# Altium PCB QL-EOS-S3-breakout.PcbDoc
Units mm, origin at the board's own origin, x right, y up, seen from the top; angles counter-clockwise.
Board outline 17.78 x 35.56 mm, 4 copper layers (Top Layer, Layer 1, Layer 2, Bottom Layer), stack 1.17 mm thick; 45 components, 65 nets, 208 pads, 83 vias.
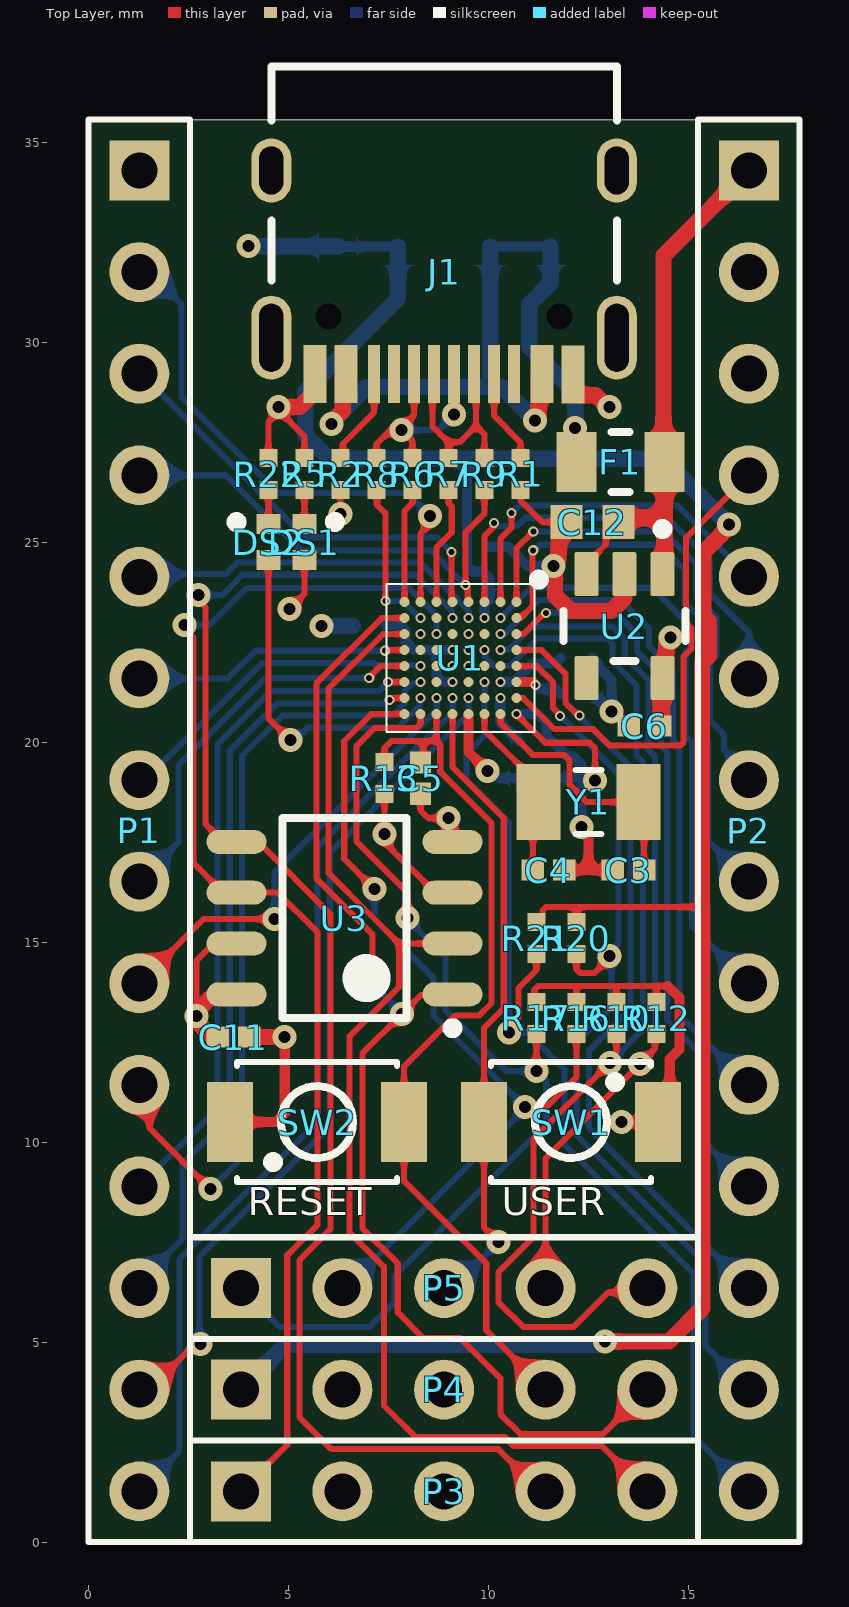
[diagram p0: Top Layer view]
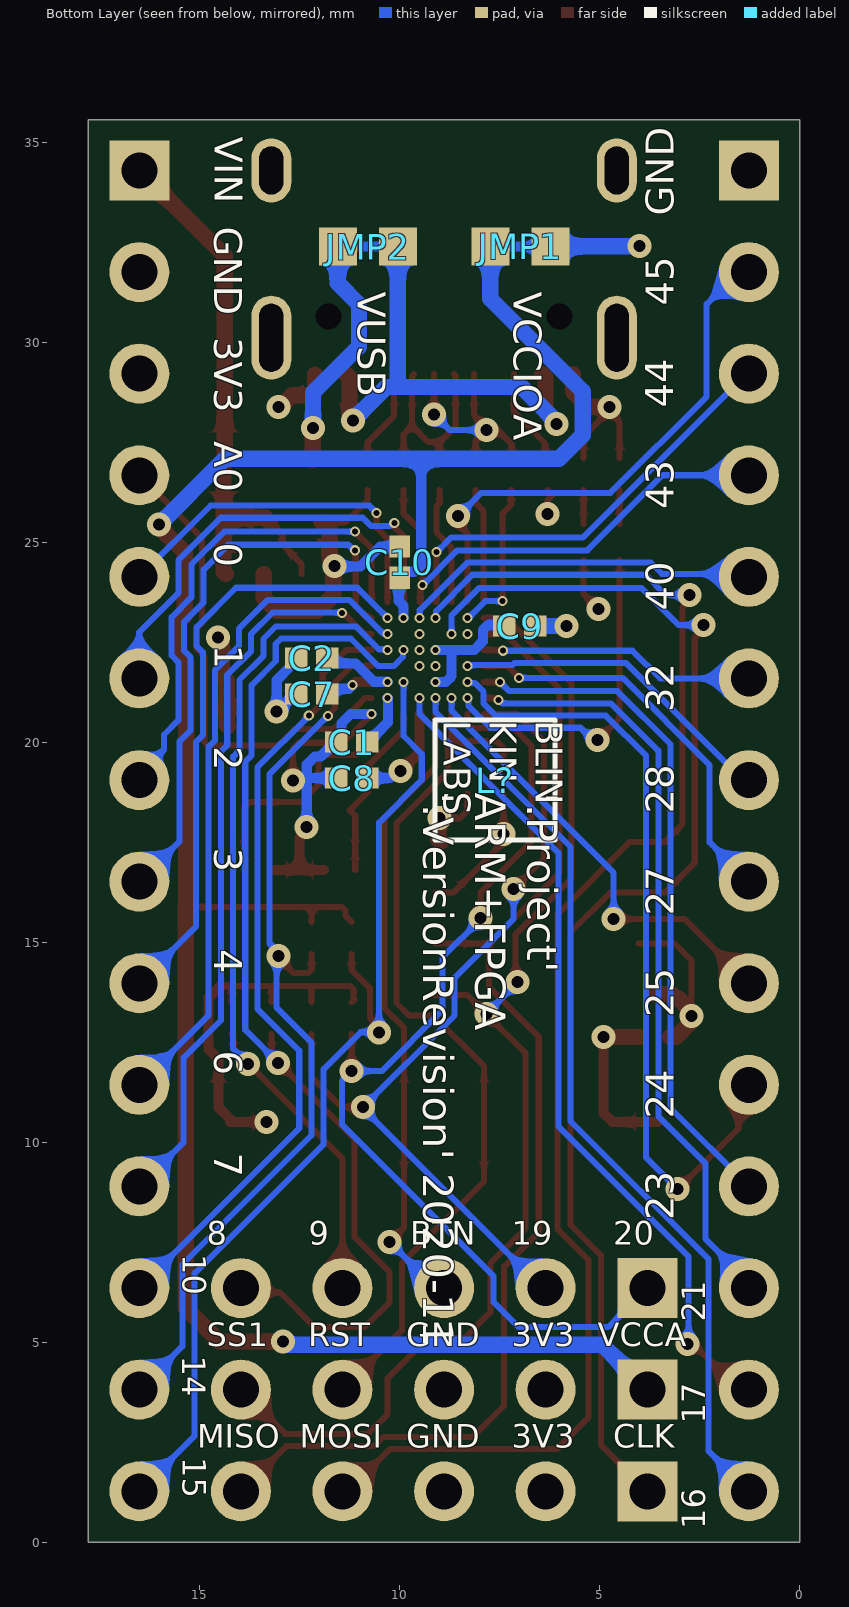
[diagram p1: Bottom Layer view, seen from below]
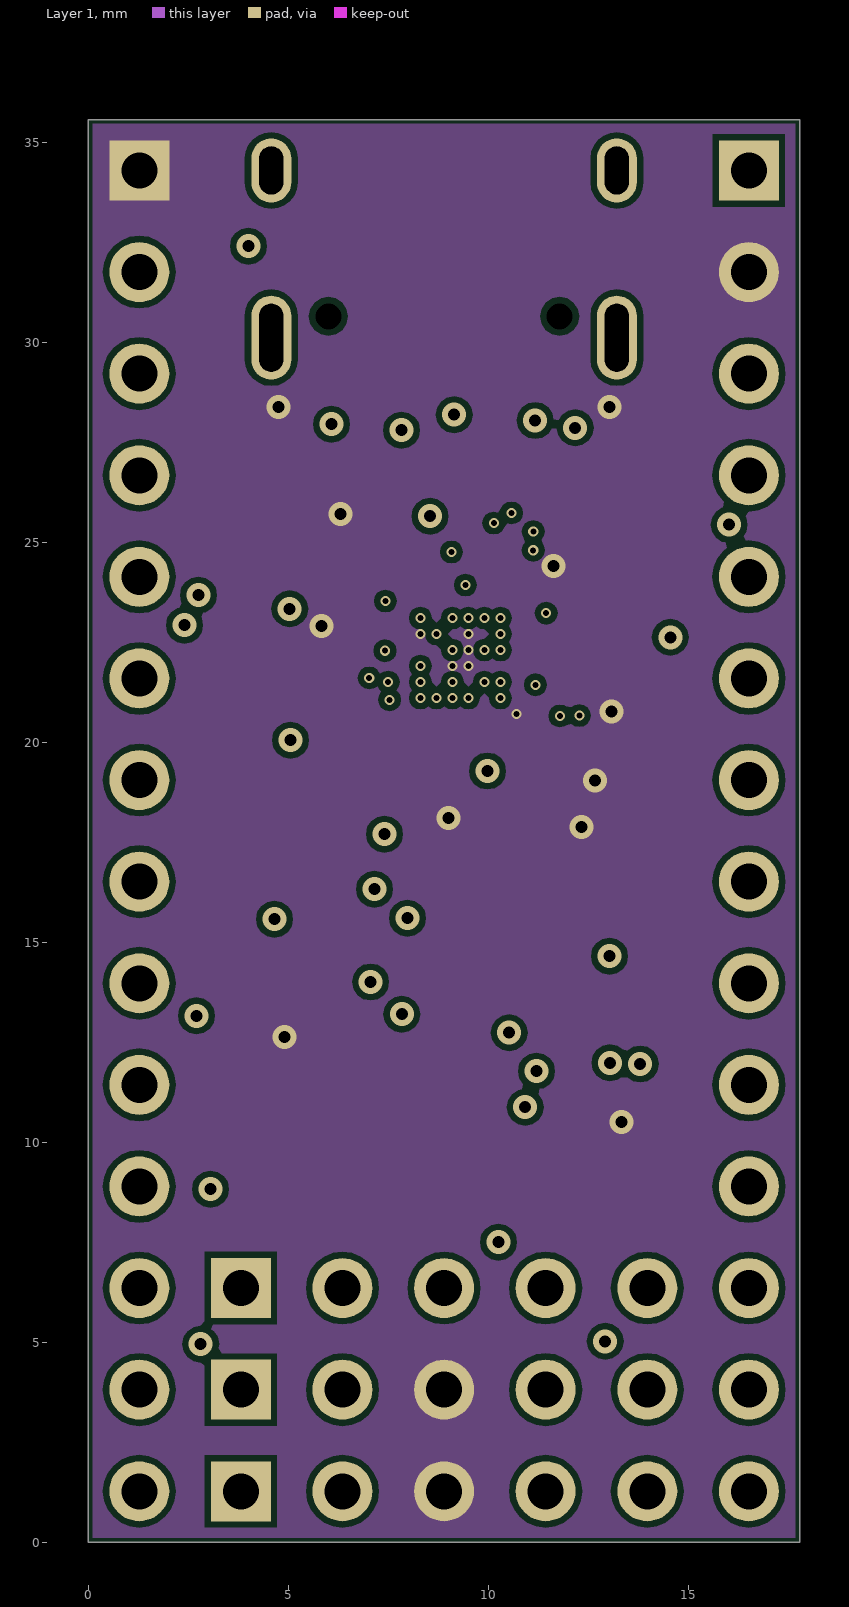
[diagram p2: Layer 1]
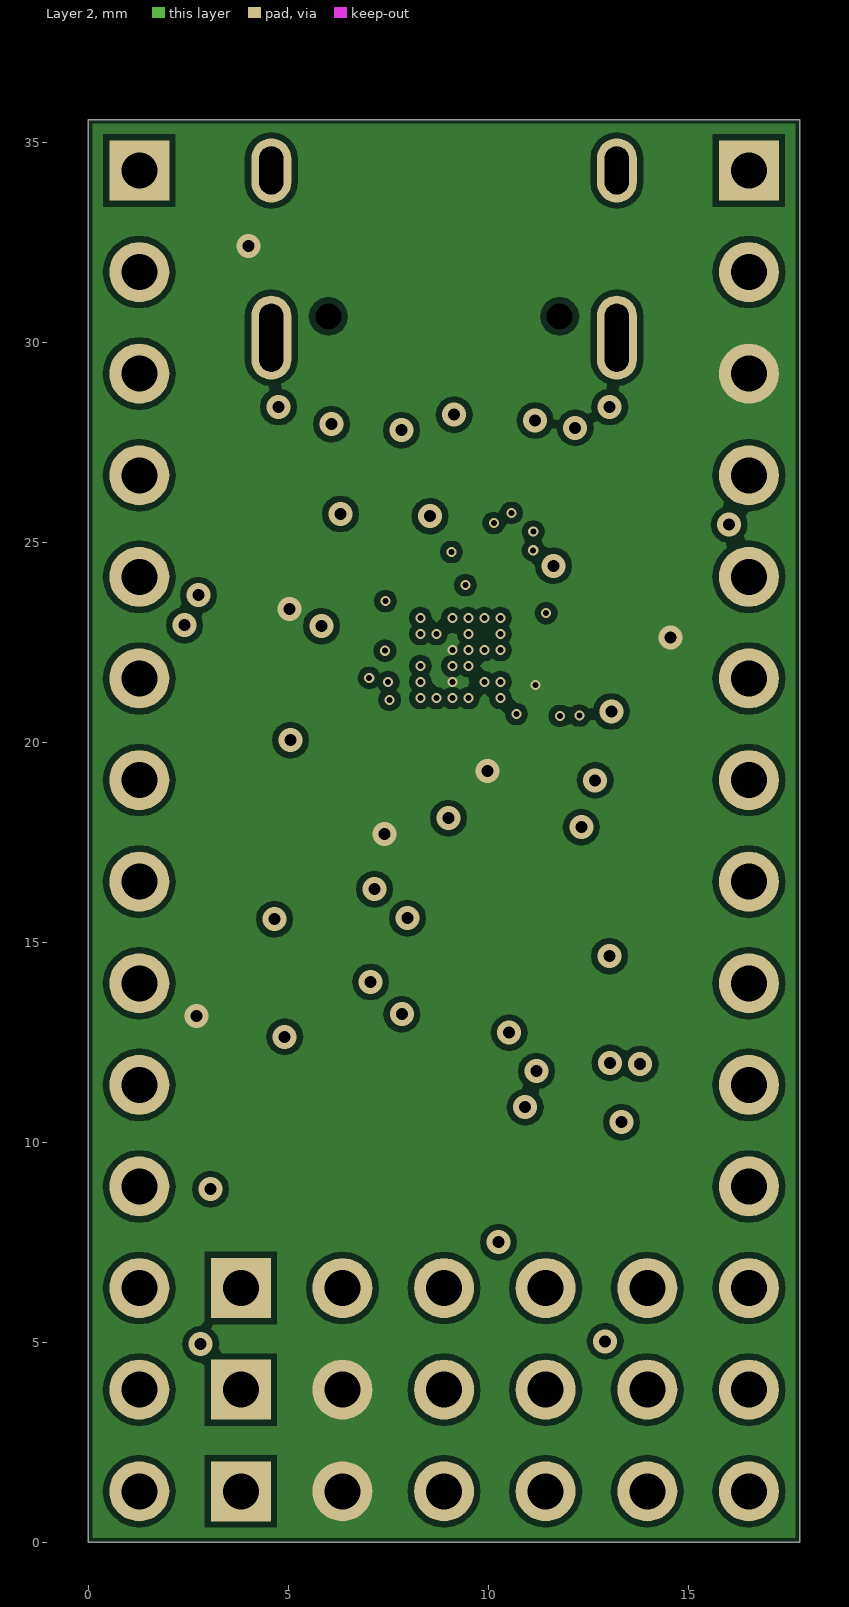
[diagram p3: Layer 2]

## Layer stack, top to bottom
Top Solder: solder mask 0.0127, SM-001, Dk 4
Top Layer: signal copper 0.035
Dielectric 2: prepreg 0.2, PP-022, Dk 4.6
Layer 1: signal copper 0.0175
Dielectric 3: core 0.665, Core-039, Dk 4.8
Layer 2: signal copper 0.0175
Dielectric 4: prepreg 0.2, PP-022, Dk 4.6
Bottom Layer: signal copper 0.035
Bottom Solder: solder mask 0.0127, SM-001, Dk 4

## Board outline
0,0 0,35.56 17.78,35.56 17.78,0

## Design rules (kind name [scope] priority, off if disabled: settings)
BoardOutlineClearance [IsPolygon] p1: gap=0.1 ignorepadtopadclearanceinfootprint=FALSE
Clearance Clearance_bga_pads [InComponent('U1') and ispad] p1: gap=0.148 ignorepadtopadclearanceinfootprint=FALSE
Clearance Clearance_jumpers [InComponent('JMP1') or InComponent('JMP2') vs InNet('VCCIOA') or InNet('+5V_USB') or InNet('+5V_FUSE')] p2: gap=0.152 ignorepadtopadclearanceinfootprint=FALSE except(0: Arc-Arc Arc-Track Arc-SMDPad Track-Track Track-SMDPad)
Clearance Clearance_bga_vias [istrack or ((ObjectKind = 'Via') And (AsMils(ViaDiameter) = 10) And (AsMils(HoleDiameter) = 5.906)  ) vs (ObjectKind = 'Via') And (AsMils(ViaDiameter) = 10) And (AsMils(HoleDiameter) = 5.906)] p3: gap=0.127 ignorepadtopadclearanceinfootprint=FALSE
Clearance [All] p4: gap=0.152 ignorepadtopadclearanceinfootprint=FALSE
HoleToHoleClearance [All] p1: gap=0.25 allowstackedmicrovias=TRUE
MinimumSolderMaskSliver MinimumSolderMaskSliver_passive [HasFootprint('CAPC1005X06L') or HasFootprint('ERJ2G(0402)_L')] p1: minsoldermaskwidth=0
MinimumSolderMaskSliver MinimumSolderMaskSliver_bga [InComponent('U1') and IsPad vs InComponent('U1') and IsPad] p2: minsoldermaskwidth=0.05
MinimumSolderMaskSliver [All] p3: minsoldermaskwidth=0.148
PolygonConnect PolygonConnect_inner_power [IsPolygon and (OnLayer('Layer 1') or OnLayer('Layer 2'))] p1: connectstyle=Direct reliefconductorwidth=0.254 reliefentries=4 polygonreliefangle="90 Angle" airgapwidth=0.254
PolygonConnect [All] p2: thpad.connectstyle=Relief thpad.reliefconductorwidth=0.254 thpad.reliefentries=4 thpad.polygonreliefangle="90 Angle" thpad.airgapwidth=0.254 smdpad.connectstyle=Relief smdpad.reliefconductorwidth=0.254 smdpad.reliefentries=4 smdpad.polygonreliefangle="90 Angle" smdpad.airgapwidth=0.254 via.connectstyle=Direct via.reliefconductorwidth=0.254 via.reliefentries=4 via.polygonreliefangle="90 Angle" via.airgapwidth=0.254
RoomDefinition "[03] SOC" [InComponentClass('[03] SOC')] p1: confinementstyle=ConfineIn formatcopy=TRUE lockcomponents=FALSE outline -3.81,-1.27 24.13,-1.27 24.13,39.37 -3.81,39.37
RoutingVias [All] p1: holewidth=0.3 width=0.6 viastyle="Through Hole" minholewidth=0.15 minwidth=0.254 maxholewidth=0.3 maxwidth=0.6
ShortCircuit ShortCircuit_jumpers [InComponent('JMP1') or InComponent('JMP2') vs InNet('VCCIOA') or InNet('+5V_USB') or InNet('+5V_FUSE')] p1: allowed=TRUE
ShortCircuit [All] p2: allowed=FALSE
SolderMaskExpansion SolderMaskExpansion_via [IsVia] p1: expansion=-99 istentingtop=FALSE
SolderMaskExpansion [All] p2: expansion=0.102 istentingtop=FALSE
Width [All] p1: maxlimit=0.406 minlimit=0.152 preferedwidth=0.254
27 further rules are at their usual default settings.

## Classes and differential pairs
net class USB: S3_USB_D_N S3_USB_D_P USB_D_N USB_D_P
net class SPI: SPI_MST_CLK SPI_MST_MISO SPI_MST_MOSI SPI_MST_SS1

## Components (designator, comment, footprint, x,y, rotation, side; value= is the part's Value field where it differs from the comment)
C1 "4.7uF" CAPC1005X06L 11.2,20 r0 bottom
C2 "4.7uF" CAPC1005X06L 12.2,22.1 r0 bottom
C3 "12pF" CAPC1005X06L 13.5,16.8 r0 top
C4 "12pF" CAPC1005X06L 11.5,16.8 r180 top
C5 "4.7uF" CAPC1005X06L 8.3,19.1 r270 top
C6 "4.7uF" CAPC1005X06L 13.9,20.4 r180 top
C7 "0.10uF" CAPC1005X06L 12.2,21.2 r180 bottom
C8 "0.10uF" CAPC1005X06L 11.2,19.1 r180 bottom
C9 "0.10uF" CAPC1005X06L 7,22.9 r0 bottom
C10 "0.10uF" CAPC1005X06L 10,24.5 r270 bottom
C11 "0.10uF" CAPC1005X06L 3.625,12.625 r180 top
C12 "4.7uF" CAPC1608X09L 12.6,25.5 r180 top
DS1 "SML-P12PTT86" FP-SML-P1-MFG 5.4,25 r270 top
DS2 "SMLP12BC7TT86" FP-SML-P12-MFG 4.5,25 r270 top
F1 "MF-PSMF050X-2" FP-MF-PSMF-MFG 13.3,27 r0 top value=0.15-0.9Ω
J1 "TYPE-C-31-M-12" TYPE-C-31-M-12 8.89,34.29 r180 top locked
JMP1 "config_jumper_0603" config_jumper_0603 6.985,32.385 r0 bottom
JMP2 "config_jumper_0603" config_jumper_0603 10.795,32.385 r0 bottom
L? "BLINKINLABS_LOGO" BLINKINLABS_LOGO_SMALL 7.62,19.05 r270 bottom
P1 "Header 14" HDR1X14 1.27,34.29 r270 top locked
P2 "Header 14" HDR1X14 16.51,34.29 r270 top locked
P3 "Header 5" HDR1X5 3.81,1.27 r0 top
P4 "Header 5" HDR1X5 3.81,3.81 r0 top
P5 "Header 5" HDR1X5 3.81,6.35 r0 top
R1 "5.1k" ERJ2G(0402)_L 10.8,26.7 r270 top
R2 "5.1k" ERJ2G(0402)_L 6.3,26.7 r90 top
R5 "1.5k" ERJ2G(0402)_L 5.4,26.7 r270 top
R6 "22" ERJ2G(0402)_L 8.1,26.7 r90 top
R7 "22" ERJ2G(0402)_L 9,26.7 r90 top
R8 "1.5k" ERJ2G(0402)_L 7.2,26.7 r90 top
R9 "1.5k" ERJ2G(0402)_L 9.9,26.7 r90 top
R10 "10k" ERJ2G(0402)_L 13.2,13.1 r90 top
R12 "10k" ERJ2G(0402)_L 14.2,13.1 r90 top
R13 "10k" ERJ2G(0402)_L 7.4,19.1 r90 top
R16 "10k" ERJ2G(0402)_L 12.2,13.1 r90 top
R17 "10k" ERJ2G(0402)_L 11.2,13.1 r90 top
R20 "10k" ERJ2G(0402)_L 12.2,15.1 r270 top
R21 "10k" ERJ2G(0402)_L 11.2,15.1 r270 top
R22 "1.5k" ERJ2G(0402)_L 4.5,26.7 r90 top
SW1 "TS-1185" TS-1185 12.065,10.5 r180 top
SW2 "TS-1185" TS-1185 5.715,10.5 r0 top
U1 "QL-EOS-S3" BGA64C40P8X8_350X350X80 9.3,22.1 r270 top
U2 "TLV73333PDBVR" FP-DBV0005A-MFG 13.4,22.9 r270 top
U3 "GD25Q16CTIG" SOP127P600X175-8N-2 6.4,15.6 r180 top
Y1 "ECS-.327-12.5-34B-TR" FP-ECX-31B-MFG 12.5,18.5 r180 top

## Footprints (in the part's own frame and the unit in brackets; to place one, negate y for a bottom-side part, rotate by r counter-clockwise, add the part's x,y. Pads: shape width x height; smd on the part's side, far side on the other; paste and mask are expansions set on the pad)
BGA64C40P8X8_350X350X80 [mm] "BGA, 64-Leads, Body 3.50x3.50mmx0.80mm, Pitch 0.40mm"
  round 0.25 smd mask+0.05: A1(-1.4,1.4) A2(-1,1.4) A3(-0.6,1.4) A4(-0.2,1.4) A5(0.2,1.4) A6(0.6,1.4) A7(1,1.4) A8(1.4,1.4) B1(-1.4,1) B2(-1,1) B3(-0.6,1) B4(-0.2,1) B5(0.2,1) B6(0.6,1) B7(1,1) B8(1.4,1) C1(-1.4,0.6) C2(-1,0.6) C3(-0.6,0.6) C4(-0.2,0.6) C5(0.2,0.6) C6(0.6,0.6) C7(1,0.6) C8(1.4,0.6) D1(-1.4,0.2) D2(-1,0.2) D3(-0.6,0.2) D4(-0.2,0.2) D5(0.2,0.2) D6(0.6,0.2) D7(1,0.2) D8(1.4,0.2) E1(-1.4,-0.2) E2(-1,-0.2) E3(-0.6,-0.2) E4(-0.2,-0.2) E5(0.2,-0.2) E6(0.6,-0.2) E7(1,-0.2) E8(1.4,-0.2) F1(-1.4,-0.6) F2(-1,-0.6) F3(-0.6,-0.6) F4(-0.2,-0.6) F5(0.2,-0.6) F6(0.6,-0.6) F7(1,-0.6) F8(1.4,-0.6) G1(-1.4,-1) G2(-1,-1) G3(-0.6,-1) G4(-0.2,-1) G5(0.2,-1) G6(0.6,-1) G7(1,-1) G8(1.4,-1) H1(-1.4,-1.4) H2(-1,-1.4) H3(-0.6,-1.4) H4(-0.2,-1.4) H5(0.2,-1.4) H6(0.6,-1.4) H7(1,-1.4) H8(1.4,-1.4)
  silkscreen extent -2.08,-1.85 1.85,2.08, body extent -1.75,-1.75 1.75,1.75, height 0.8
BLINKINLABS_LOGO_SMALL [mm] "Small blinkinlabs logo"
  silkscreen extent -1.5,-1.5 1.5,1.5
CAPC1005X06L [mm] "Chip Capacitor, 2-Leads, Body 1.00x0.50mm, IPC High Density"
  rect 0.56x0.52 smd: 1(-0.39,0) 2(0.39,0)
  body extent -0.53,-0.28 0.53,0.28, height 0.55
CAPC1608X09L [mm] "Chip Capacitor, 2-Leads, Body 1.60x0.80mm, IPC High Density"
  rect 0.8x0.85 smd: 1(-0.65,0) 2(0.65,0)
  body extent -0.85,-0.45 0.85,0.45, height 0.9
config_jumper_0603 [mm]
  rect 0.95x0.95 smd: 1(-0.75,0) 2(0.75,0)
  Top Layer lines w0.254: -0.75,0 0.75,0
ERJ2G(0402)_L [mm] "Chip Resistor, 2-Leads, Body 1.00x0.50mm, IPC High Density"
  rect 0.45x0.45 smd: 1(-0.4,0) 2(0.4,0)
  body extent -0.53,-0.27 0.53,0.28, height 0.4
FP-DBV0005A-MFG [mm]
  rrect17% 1.1x0.6 smd paste+0 mask+0: 1(-1.3,0.95) 2(-1.3,0) 3(-1.3,-0.95) 4(1.3,-0.95) 5(1.3,0.95)
  silkscreen extent -2.55,-1.53 0.87,1.52, body extent -1.95,-1.78 1.95,1.78, height 0.25
FP-ECX-31B-MFG [mm]
  rect 1.1x1.9 smd paste+0 mask+0: 1(-1.25,0) 2(1.25,0)
  silkscreen extent -0.33,-0.8 0.33,0.8, body extent -1.9,-1.05 1.9,1.05, height 0.25
FP-MF-PSMF-MFG [mm]
  rect 1x1.5 smd paste+0 mask+0: 1(-1.1,0) 2(1.1,0)
  silkscreen extent -0.23,-0.75 0.23,0.75, body extent -1.7,-0.85 1.7,0.85, height 0.25
FP-SML-P1-MFG [mm]
  rect 0.5x0.6 smd paste+0 mask+0: 1(-0.45,0) 2(0.45,0)
  silkscreen extent -0.63,0.64 -0.38,0.89, body extent -0.8,-0.43 0.8,0.43, height 0.25
FP-SML-P12-MFG [mm]
  rect 0.5x0.6 smd paste+0 mask+0: 1(-0.45,0) 2(0.45,0)
  silkscreen extent -0.62,-0.92 -0.38,-0.67, body extent -0.8,-0.43 0.8,0.43, height 0.25
HDR1X5 [mm] "Connector; Header; 5 Position"
  rect 1.5x1.5 hole 0.9: 1(0,0)
  round 1.5 hole 0.9: 2(2.54,0) 3(5.08,0) 4(7.62,0) 5(10.16,0)
  silkscreen extent -1.27,-1.27 11.43,1.27
HDR1X14 [mm] "Connector; Header; 14 Position"
  rect 1.5x1.5 hole 0.9: 1(0,0)
  round 1.5 hole 0.9: 2(2.54,0) 3(5.08,0) 4(7.62,0) 5(10.16,0) 6(12.7,0) 7(15.24,0) 8(17.78,0) 9(20.32,0) 10(22.86,0) 11(25.4,0) 12(27.94,0) 13(30.48,0) 14(33.02,0)
  silkscreen extent -1.27,-1.27 34.29,1.27
SOP127P600X175-8N-2 [mm] "SOP, 8-Leads, Body 4.90x3.85mm, Pitch 1.27mm, IPC Medium Density"
  oval 1.5x0.6 smd: 1(-2.7,1.905) 2(-2.7,0.635) 3(-2.7,-0.635) 4(-2.7,-1.905) 5(2.7,-1.905) 6(2.7,-0.635) 7(2.7,0.635) 8(2.7,1.905)
  silkscreen extent -2.83,-2.5 1.55,2.88, body extent -3,-2.5 3,2.5, height 1.75
TS-1185 [mm] "3x4x2mm Tact Switch, no alignment pin"
  rect 1.15x2 smd: 1(-2.175,0) 2(2.175,0)
  silkscreen extent -2,-1.5 2,1.5, body extent -2,-1.5 2,1.5, height 2
TYPE-C-31-M-12 [mm] "USB Connector TYPE-C-31-M-12 Female 16P SMD"
  rect 0.575x1.45 smd mask+0.03: A1/B12(-3.225,5.1) A4/B9(-2.45,5.092) A9/B4(2.45,5.092) A12/B1(3.225,5.092)
  rect 0.3x1.45 smd mask+0.03: A5(-1.25,5.092) A6(-0.25,5.092) A7(0.25,5.092) A8(1.25,5.092) B5(1.75,5.092) B6(0.75,5.092) B7(-0.75,5.092) B8(-1.75,5.092)
  round 0 hole 0.65 unplated paste+0: MP1(-2.89,3.65) MP2(2.89,3.65)
  rrect100% 1x2.1 hole 0.6 slot 1.7 at 90 deg: SHIELD1(-4.32,4.18) SHIELD2(4.32,4.18)
  rrect100% 1x1.6 hole 0.6 slot 1.2 at 90 deg: SHIELD3(-4.32,0) SHIELD4(4.32,0)
  silkscreen extent -4.32,-2.6 4.32,2.75, body extent -4.79,-2.6 4.79,5.11, height 3.31

## Part data
C1 C2 C5 C6: library part GRM155R60J475ME47D, "CAP CER 4.7UF 6.3V X5R 0402", Case/Package=0402, Digi-Key Part Number=490-5915-1-ND, Manufacturer="Murata Electronics North America", Operating Temperature="-55°C ~ 85°C", Package / Case="0402 (1005 Metric)", Temperature Coefficient=X5R, Tolerance=±20%, Voltage=6.3V, Applications="General Purpose", Datasheets=http://www.murata.com/~/media/webrenewal/support/library/catalog/products/capacitor/mlcc/c02e.pdf, Features="Derating Recommended", Image=//media.digikey.com/Renders/Murata%20Renders/ZRB-SERIES-0402.jpg, Packaging="Cut Tape (CT)", PartNumber=GRM155R60J475ME47D, Series=GRM
C3 C4: library part GRM1555C1E120GA01D, "CAP CER 12PF 25V NP0 0402", Case/Package=0402, Digi-Key Part Number=490-8169-1-ND, Manufacturer="Murata Electronics North America", Operating Temperature="-55°C ~ 125°C", Package / Case="0402 (1005 Metric)", Temperature Coefficient="C0G, NP0", Tolerance=±2%, Voltage=25V, Applications="General Purpose", Datasheets=http://www.murata.com/~/media/webrenewal/support/library/catalog/products/capacitor/mlcc/c02e.pdf, Features=-, Image=//media.digikey.com/Renders/Murata%20Renders/ZRB-SERIES-0402.jpg, Packaging="Cut Tape (CT)", PartNumber=GRM1555C1E120GA01D, Series=GRM
C7 C8 C9 C10 C11: library part GRM152R61A104ME19D, "CAP CER 0.1UF 10V X5R 0402", Case/Package=0402, Digi-Key Part Number=490-10009-1-ND, Manufacturer="Murata Electronics North America", Operating Temperature="-55°C ~ 85°C", Package / Case="0402 (1005 Metric)", Temperature Coefficient=X5R, Tolerance=±20%, Voltage=10V, Applications="General Purpose", Datasheets=http://www.murata.com/~/media/webrenewal/support/library/catalog/products/capacitor/mlcc/c02e.pdf, Features="Derating Recommended", Image=//media.digikey.com/Renders/Murata%20Renders/ZRB-SERIES-0402.jpg, Packaging="Cut Tape (CT)", PartNumber=GRM152R61A104ME19D, Series=GRM
C12: library part GRM188R61A475KE15D, "CAP CER 4.7UF 10V X5R 0603", Case/Package=0603, Digi-Key Part Number=490-10477-1-ND, Manufacturer="Murata Electronics North America", Operating Temperature="-55°C ~ 85°C", Package / Case="0603 (1608 Metric)", Temperature Coefficient=X5R, Tolerance=±10%, Voltage=10V, Applications="General Purpose", Datasheets=http://www.murata.com/~/media/webrenewal/support/library/catalog/products/capacitor/mlcc/c02e.pdf, Features="Derating Recommended", Image=//media.digikey.com/Renders/Murata%20Renders/ZRB-SERIES-0402.jpg, PartNumber=GRM188R61A475KE15D, Series=GRM
DS1: library part CMP-08952-000020-1, "LED GREEN CLEAR 1006 SMD", Colour=Green, Forward Current=20mA, Forward Voltage=2.1V, Manufacturer=Rohm, Package=SML-P1, Power Dissipation=52mW, Reverse Voltage=5V, Temperature="-40°C to +85°C", Temperature Range High=+85°C, Temperature Range Low=-40°C, Automotive=No, Category=Diode, ComponentLink2Description=Datasheet, ComponentLink2URL=https://www.rohm.com/datasheet/SML-P12DT(R), Device Class L1=Optoelectronics, Device Class L2=LEDs, Device Class L3=unset, Digikey Description="LED GREEN CLEAR 1006 SMD", Height=0.25mm, Lead Free=Yes, Led Orientation="Top View", Luminous Intensity=10mcd, Manufacturer Part Number=SML-P12PTT86, Mouser Description="Standard LEDs - SMD SMD Green 13 mcd height=0.2", Octopart=https://octopart.com/sml-p12ptt86-rohm-9290705, RoHS=TRUE, Wavelength=560nm
DS2: library part CMP-08952-000025-1, "LED BLUE CLEAR 1006 SMD", Colour=Blue, Forward Current=5mA, Forward Voltage=2.9V, Manufacturer=Rohm, Package=SML-P12, Power Dissipation=66mW, Reverse Voltage=5V, Temperature="-40°C to +85°C", Temperature Range High=+85°C, Temperature Range Low=-40°C, Automotive=No, Category=Diode, ComponentLink2Description=Datasheet, ComponentLink2URL=https://media.digikey.com/pdf/Data%20Sheets/Rohm%20PDFs/SML-P1_Series_RevB.pdf, Device Class L1=Optoelectronics, Device Class L2=LEDs, Device Class L3=unset, Digikey Description="LED BLUE CLEAR 1006 SMD", Height=0.25mm, Lead Free=Yes, Led Orientation="Top View", Luminous Intensity=17mcd, Manufacturer Part Number=SMLP12BC7TT86, Mouser Description="ROHM SMLP12BC7TT86, SML-P12 PICOLED Series Blue LED, 1006(0402), Rectangle Lens", Octopart=https://octopart.com/smlp12bc7tt86-rohm-9290887, RoHS=TRUE, Wavelength=470nm
F1: library part CMP-07400-000013-1, "PTC RESET FUSE 6V 500MA 0805", Ambient Temperature Range High=+85°C, Ambient Temperature Range Low=-40°C, Current Rating=40A, Hold Current=0.5A, Manufacturer="Bourns Inc.", Package=MF-PSMF, Resistance=0.15-0.9Ω, Temperature="-40°C to +85°C", Trip Current=1A, Voltage Rating=6V, Automotive=Yes, Category=Fuse, ComponentLink2Description=Datasheet, ComponentLink2URL=https://www.bourns.com/docs/product-datasheets/mfpsmf.pdf?sfvrsn=9c05cafe_24, Device Class L1="Circuit Protection", Device Class L2="PTC Resettable Fuses", Device Class L3=unset, Digikey Description="PTC RESET FUSE 6V 500MA 0805", Height=0.85mm, Lead Free=Yes, Manufacturer Part Number=MF-PSMF050X-2, Mouser Description="Resettable Fuses - PPTC .50A 6V 0.15ohm Hold .5 Trip 1", Octopart=https://octopart.com/mf-psmf050x-2-bourns-7483438, RoHS=TRUE, Temperature Range High=+85°C, Temperature Range Low=-40°C, Trip Time=0.1s
J1: "USB Connector TYPE-C-31-M-12 Female 16P SMD", Manufacturer=HRO, PartNumber=TYPE-C-31-M-12
JMP1 JMP2: "Shorted-by-default jumper, with 0603 pad"
L?: "Square logo"
P1 P2: "Header, 14-Pin", LatestRevisionDate=17-Jul-2002, LatestRevisionNote="Re-released for DXP Platform.", Publisher="Altium Limited"
P3 P4 P5: "Header, 5-Pin", LatestRevisionDate=17-Jul-2002, LatestRevisionNote="Re-released for DXP Platform.", Publisher="Altium Limited"
R1 R2: library part ERJ-2GEJ512X, "RES SMD 5.1K OHM 5% 1/10W 0402", Case/Package=0402, Digi-Key Part Number=P5.1KJCT-ND, Manufacturer="Panasonic Electronic Components", Operating Temperature="-55°C ~ 155°C", Package / Case="0402 (1005 Metric)", Power (Watts)="0.1W, 1/10W", Temperature Coefficient=±200ppm/°C, Tolerance=±5%, Composition="Thick Film", Datasheets=http://industrial.panasonic.com/www-cgi/jvcr13pz.cgi?E+PZ+3+AOA0001+ERJ2GEJ512X+7+WW, Features="Automotive AEC-Q200", Height - Seated (Max)="0.016\" (0.40mm)", Image=//media.digikey.com/Photos/Panasonic%20Photos/ERJ-PA2-Series.jpg, Number of Terminations=2, PartNumber=ERJ-2GEJ512X, Series=ERJ, Size / Dimension="0.039\" L x 0.020\" W (1.00mm x 0.50mm)"
R5 R8 R9 R22: library part ERJ-2GEJ152X, "RES SMD 1.5K OHM 5% 1/10W 0402", Case/Package=0402, Digi-Key Part Number=P1.5KJCT-ND, Manufacturer="Panasonic Electronic Components", Operating Temperature="-55°C ~ 155°C", Package / Case="0402 (1005 Metric)", Power (Watts)="0.1W, 1/10W", Temperature Coefficient=±200ppm/°C, Tolerance=±5%, Composition="Thick Film", Datasheets=http://industrial.panasonic.com/www-cgi/jvcr13pz.cgi?E+PZ+3+AOA0001+ERJ2GEJ152X+7+WW, Features="Automotive AEC-Q200", Height - Seated (Max)="0.016\" (0.40mm)", Image=//media.digikey.com/Photos/Panasonic%20Photos/ERJ-PA2-Series.jpg, Number of Terminations=2, PartNumber=ERJ-2GEJ152X, Series=ERJ, Size / Dimension="0.039\" L x 0.020\" W (1.00mm x 0.50mm)"
R6 R7: library part ERJ-2GEJ220X, "RES SMD 22 OHM 5% 1/10W 0402", Case/Package=0402, Digi-Key Part Number=P22JCT-ND, Manufacturer="Panasonic Electronic Components", Operating Temperature="-55°C ~ 155°C", Package / Case="0402 (1005 Metric)", Power (Watts)="0.1W, 1/10W", Temperature Coefficient=±200ppm/°C, Tolerance=±5%, Composition="Thick Film", Datasheets=http://industrial.panasonic.com/www-cgi/jvcr13pz.cgi?E+PZ+3+AOA0001+ERJ2GEJ220X+7+WW, Features="Automotive AEC-Q200", Height - Seated (Max)="0.016\" (0.40mm)", Image=//media.digikey.com/Photos/Panasonic%20Photos/ERJ-PA2-Series.jpg, Number of Terminations=2, PartNumber=ERJ-2GEJ220X, Series=ERJ, Size / Dimension="0.039\" L x 0.020\" W (1.00mm x 0.50mm)"
R10 R12 R13 R16 R17 R20 R21: library part ERJ-2GEJ103X, "RES SMD 10K OHM 5% 1/10W 0402", Case/Package=0402, Digi-Key Part Number=P10KJCT-ND, Manufacturer="Panasonic Electronic Components", Operating Temperature="-55°C ~ 155°C", Package / Case="0402 (1005 Metric)", Power (Watts)="0.1W, 1/10W", Temperature Coefficient=±200ppm/°C, Tolerance=±5%, @ qty=1500, Composition="Thick Film", Datasheets=http://industrial.panasonic.com/www-cgi/jvcr13pz.cgi?E+PZ+3+AOA0001+ERJ2GEJ103X+7+WW, Factory Stock=0, Failure Rate=-, Features="Automotive AEC-Q200", Height - Seated (Max)="0.016\" (0.40mm)", Image=//media.digikey.com/Photos/Panasonic%20Photos/ERJ-PA2-Series.jpg, Minimum Quantity=1, Number of Terminations=2, Packaging="Cut Tape (CT)", Part Number=ERJ-2GEJ103X, Part Status=Active, PartNumber=ERJ-2GEJ103X, Quantity Available=2560215, Series=ERJ, Size / Dimension="0.039\" L x 0.020\" W (1.00mm x 0.50mm)", Unit Price (USD)=0.00350
SW1 SW2: "Tact Switch, 3x4mm, no alignment pin, turtle style", Manufacturer=XKB, PartNumber=TS-1185
U1: "QuickLogicEOS S3 Ultra Low Power multicore MCU", Manufacturer="QuickLogic Corporation", PartNumber=QL-EOS-S3
U2: library part CMP-04917-000053-1, "IC REG LINEAR 3.3V 300MA SOT23-5", Dropout Voltage=125mV, Manufacturer="Texas Instruments", Max Junction Temp=+125°C, Max Supply Voltage=5.5V, Min Supply Voltage=1.4V, Nominal Supply Current=34uA, Output Current=300mA, Output Voltage=3.3V, Package=DBV0005A, Temperature="-40°C to +125°C", Temperature Range Low=-40°C, Accuracy Percentage=1%, Automotive=No, Category=IC, ComponentLink2Description=Datasheet, ComponentLink2URL=http://www.ti.com/lit/ds/symlink/tlv733p.pdf, Device Class L1="Integrated Circuits (ICs)", Device Class L2="Power Management ICs", Device Class L3="Voltage Regulators - Linear", Digikey Description="IC REG LINEAR 3.3V 300MA SOT23-5", Height=1.45mm, Lead Free=Yes, Manufacturer Part Number=TLV73333PDBVR, Mouser Description="LDO Voltage Regulators Capacitr-Free 300-mA 5-SOT-23 -40 to 125", Number Of Outputs=1, Octopart=https://octopart.com/tlv73333pdbvr-texas+instruments-51080890, Output Type=Fixed, RoHS=TRUE, Standoff Height=0mm, Temperature Range High=+125°C
U3: "16M-bit Serial Flash, 256 Bytes per programmable page, standard, dual, quad SPI", Manufacturer=Gigadevice, PartNumber=GD25Q16CTIG
Y1: library part CMP-40224-000020-1, "CRYSTAL 32.7680KHZ 12.5PF SMD", Case/Package=SMD/SMT, ESR (Equivalent Series Resistance)=70kR, Frequency=32.768kHz, Frequency Tolerance=20ppm, Load Capacitance=12.5pF, Max Operating Temperature=85°C, Min Operating Temperature=-40°C, Package Quantity=3000, Height=0.035inch, Length=0.126inch, Mount="Surface Mount", Number of Pins=2, Packaging="Tape and Reel", Termination=SMD/SMT, Width=0.059inch

## Via types
v1: diameter 0.6, hole 0.3, Top Layer to Bottom Layer, 42 vias
v2: diameter 0.254, hole 0.15, Top Layer to Bottom Layer, 41 vias

## Nets (pads, with @x,y where several pads share a name; then routed paths per layer and width w, separated by ;. In a path a pad name is that pad's centre, name@x,y a point inside that pad or via, vN(x,y) a via of type N, cw(c..) or ccw(c..) an arc to the next point about the centre after c; other vN are vias at no path point)
+3.3V: C6.1 C7.2 C8.2 C9.2 C11.2 DS1.2 JMP1.1 P2.3 P3.2 P4.2 R13.1 U1.A6 U1.D8 U1.E4 U1.E6 U2.5 U3.3 U3.7 U3.8 | length 21.3
  Top Layer w0.152: v1(2.7,13.155) 2.7,14.536 3.129,14.965 U3.7 U3.7@4.029,14.965 ; v1(5.029,23.328) 5.029,23.333 5.4,23.704 DS1.2 ; R13.1 v1(7.4,17.7) 7.4,17.499 8.664,16.235 U3.3
  Top Layer w0.254: U1.D8 9.5,19.751 v1(9.975,19.276) ; U1.A6 11.105,21.5 v2(11.175,21.43)
  Top Layer w0.406: C11.2 3.092,12.625 2.737,12.98 2.737,13.118 v1(2.7,13.155) 2.737,13.192 2.737,13.3 3.035,13.598 3.101,13.598 3.198,13.695 U3.8 ; C6.1 14.32,20.43 14.32,21.524 14.447,21.651 14.447,22.468 14.546,22.567 v1(14.546,22.62)
  Bottom Layer w0.254: C9.2@7.44,22.925 7.794,22.925 7.919,22.8 7.919,22.516 8.135,22.3 8.7,22.3 ; v2(9.1,21.5) 8.849,21.5 8.7,21.649 8.7,22.3 ; v2(9.1,22.3) 8.7,22.3 ; v1(9.975,19.276) 10.069,19.276 10.246,19.099 10.686,19.099 C8.2@10.76,19.025 ; v2(11.175,21.43) 11.272,21.333 11.677,21.333 C7.2
  Bottom Layer w0.406: v1(4,32.4) 4.008,32.393 6.227,32.393 JMP1.1
+5V_FUSE: F1.1 JMP2.2 | length 6
  Top Layer w0.406: v1(12.169,27.856) 12.175,27.85 F1.1@12.175,27.05
  Bottom Layer w0.406: JMP2.2 11.55,32.38 11.55,31.475 11.018,30.943 11.018,29.882 12.169,28.731 v1(12.169,27.856)
+5V_USB: J1.A4/B9 J1.A9/B4 JMP2.1 | length 12
  Top Layer w0.406: v1(6.076,27.949) 6.076,28.001 6.356,28.281 6.356,29.114 J1.A9/B4 ; v1(11.169,28.04) 11.169,28.092 11.256,28.179 11.256,29.114 J1.A4/B9
  Bottom Layer w0.406: v1(6.076,27.949) 6.076,28.001 6.95,28.875 9.929,28.875 ; JMP2.1 10.045,28.991 9.929,28.875 ; v1(11.169,28.04) 10.334,28.875 9.929,28.875
ADC0: P2.4 U1.A7 | length 12.2
  Top Layer w0.152: U1.A7 10.873,21.1 11.651,20.322 12.625,20.322 13.035,19.911 14.789,19.911 14.879,20.001 14.879,22.133 15.075,22.329 15.075,22.839 14.943,22.97 14.943,25.111 16.502,26.67 P2.4
ADC1: U1.C7
GND: C1.2 C2.2 C3.1 C4.1 C5.2 C6.2 C7.1 C8.1 C9.1 C10.1 C11.1 C12.2 J1.A1/B12 J1.A12/B1 P1.1 P2.2 P3.3 P4.3 R1.2 R2.1 R5.1 R10.2 R12.2 R16.2 R17.2 R22.2 SW1.1 SW2.1 U1.A8 U1.D3 U1.D4 U1.D5 U1.E5 U1.G3 U2.2 U3.4 | length 43.6
  Top Layer w0.152: R22.2 4.5,28.005 4.75,28.255 v1@4.75,28.296 ; v1(4.75,28.376) v1@4.75,28.296 ; R5.1 5.4,27.647 v1@4.75,28.296 ; v1(6.3,25.701) 6.3,26.049 6.302,26.051 6.176,26.176 R2.1 ; C5.2 8.3,18.3 8.5,18.1 v1(9,18.1) ; v2(10.7,20.7) 11.417,19.983 12.523,19.983 12.665,19.841 v1(12.665,19.04) ; R1.2 10.8,26.05 11.35,25.5 C12.2 ; R17.2 11.125,13.575 11.15,13.6 11.15,13.811 11.239,13.9 12.289,13.9 ; R16.2 12.2,13.811 12.289,13.9 ; R10.2 13.2,13.868 13.232,13.9 ; R12.2 14.2,13.875 14.175,13.9 ; 14.486,13.9 14.175,13.9 ; 12.289,13.9 13.232,13.9 ; 13.232,13.9 14.175,13.9
  Top Layer w0.254: SW2.1 4.675,10.5 4.906,10.731 v1(4.906,12.631) ; C4.1 12.5,16.8 ; v1(12.324,17.871) 12.324,17.778 12.5,17.602 12.5,16.8 ; C3.1 12.5,16.8 ; v1(13.325,10.5) SW1.1 ; SW1.1@14.2,10.54 14.532,10.872 14.532,12.078 14.775,12.321 14.775,13.611 14.486,13.9
  Top Layer w0.406: C11.1 4.9,12.625 v1(4.906,12.631) ; v1(4.75,28.376) 5.281,28.376 5.665,28.761 J1.A12/B1 ; U3.4@8.973,17.505 9.037,17.569 9.037,18.063 v1(9,18.1) ; C12.2 11.753,25.303 11.753,24.571 11.625,24.443 v1(11.625,24.404) 11.625,24.39 11.662,24.353 11.662,23.665 12.052,23.275 13.075,23.275 13.4,23.6 U2.2 ; J1.A1/B12 12.115,28.753 12.199,28.668 12.683,28.668 12.976,28.375 v1(13.029,28.375)
  Bottom Layer w0.254: C9.1@6.648,22.938 C9.1@6.66,22.925 ; C10.1 10.007,24.883 10.492,24.883 10.985,24.39 11.612,24.39 v1(11.625,24.404) ; v2(10.7,20.7) 11.225,20.7 11.45,20.475 11.45,20.133 11.568,20.015 11.575,20.015 C1.2 11.61,20 11.971,19.639 12.119,19.639 12.324,19.434 12.324,19.075 ; C8.1 12.299,19.1 12.324,19.075 ; v1(12.324,17.871) 12.324,19.075 ; C2.2 12.61,22.1 12.743,21.967 12.743,21.879 13.074,21.548 v1(13.074,20.764) 13.046,20.764 12.61,21.2 C7.1 C7.1@12.634,21.156
  Bottom Layer w0.406: v1(5.825,22.9) C9.1
  other v2: 9.1,21.9 9.5,21.9 9.5,22.3 8.3,22.7 9.5,22.7
IO_0: P2.5 U1.B1 | length 9.1
  Top Layer w0.152: U1.B1 10.3,25.078 10.576,25.353 v2@10.576,25.726
  Bottom Layer w0.152: v2(10.576,25.727) 10.76,25.911 14.729,25.911 P2.5
IO_1: P2.6 U1.C1 | length 11.4
  Top Layer w0.152: U1.C1 9.898,23.502 9.898,25.143 10.135,25.379 v2(10.135,25.475)
  Bottom Layer w0.152: v2(10.135,25.475) 10.162,25.475 10.239,25.399 10.438,25.399 10.439,25.397 10.713,25.397 10.922,25.606 14.469,25.606 15.531,24.544 15.531,23.725 16.51,22.746 P2.6
IO_2: P2.7 U1.A1 | length 12.4
  Top Layer w0.152: U1.A1 10.7,24.842 v2(11.12,25.262)
  Bottom Layer w0.152: v2(11.12,25.262) 14.382,25.262 15.205,24.439 15.205,23.62 15.7,23.125 15.7,22.164 15.531,21.995 15.531,20.544 15.892,20.183 15.892,19.816 16.51,19.197 P2.7
IO_3: P2.8 U1.A2 | length 14.6
  Top Layer w0.152: U1.A2 10.808,23.1 11.096,23.389 11.096,24.772 v2(11.119,24.795)
  Bottom Layer w0.152: v2(11.119,24.795) 11.147,24.795 11.284,24.932 14.281,24.932 14.9,24.312 14.9,23.493 15.395,22.999 15.395,22.29 15.227,22.121 15.227,20.295 15.5,20.022 15.5,17.52 P2.8
IO_4: P2.9 U1.B2 | length 15.1
  Bottom Layer w0.152: v2(10.3,23.1) 11.059,23.859 14.091,23.859 15.075,22.875 15.075,22.401 14.919,22.245 14.919,20.172 15.095,19.996 15.095,15.385 P2.9
IO_5: U1.C3
IO_6: P2.10 U1.B3 | length 16.8
  Bottom Layer w0.152: v2(10.3,22.7) 10.319,22.719 10.422,22.719 11.257,23.554 13.293,23.554 14.018,22.829 14.018,22.401 14.614,21.804 14.614,20.045 14.775,19.885 14.775,13.165 P2.10
IO_7: P2.11 U1.A3 | length 18.4
  Top Layer w0.152: U1.A3 10.87,22.7 11.394,23.224 v2(11.442,23.224)
  Bottom Layer w0.152: v2(11.442,23.224) 11.455,23.237 13.179,23.237 13.713,22.703 13.713,22.274 14.31,21.678 14.31,19.919 14.47,19.758 14.47,13.039 15.4,12.109 15.4,10 P2.11
IO_8: P5.5 R10.1 U1.C4 | length 27.3
  Top Layer w0.152: v1(13.038,11.982) 13.007,11.951 v1@13.001,11.951 ; R10.1 13.2,12.247 13.001,12.047 v1@13.001,11.951 ; P5.5 13.861,6.241 12.991,6.241 12.121,5.371 10.879,5.371 10.25,6 10.25,6.75 11.125,7.625 11.125,10.075 v1@13.001,11.951
  Bottom Layer w0.152: v2(9.9,22.3) 9.919,22.281 9.919,22.126 10.146,21.9 10.533,21.9 11.221,22.589 12.965,22.589 13.099,22.455 13.099,22.026 13.7,21.425 13.7,19.667 13.861,19.506 13.861,12.804 v1(13.038,11.982)
IO_9: P5.4 R12.1 U1.B4 | length 22.1
  Top Layer w0.152: P5.4 11.43,9.592 v1(13.79,11.952) ; v1@13.786,11.963 14.159,12.336 14.159,12.659 R12.1
  Bottom Layer w0.152: v2(10.3,22.3) 10.319,22.319 10.521,22.319 11.095,22.893 13.091,22.893 13.408,22.576 13.408,22.148 14.005,21.551 14.005,19.793 14.165,19.632 14.165,12.328 v1(13.79,11.952)
IO_10: P2.12 U1.A4 | length 19.6
  Top Layer w0.152: U1.A4 11.33,22.3 11.921,21.708 11.921,20.985 12.085,20.821 12.087,20.821 12.245,20.663 v2(12.272,20.663)
  Bottom Layer w0.152: v2(12.272,20.663) 12.272,20.649 13.556,19.366 13.556,13.331 12.51,12.285 12.51,10.35 P2.12
IO_11: U1.C5
IO_12: U1.B5
IO_13: U1.D6
IO_14: P2.13 R20.2 U1.A5 | length 23.1
  Top Layer w0.152: U1.A5 11.208,21.9 11.617,21.491 11.617,20.851 11.787,20.68 v2(11.787,20.652) ; R20.2 12.2,14.32 12.289,14.231 12.656,14.231 13.027,14.602 v1(13.027,14.65)
  Bottom Layer w0.152: v2(11.787,20.652) 11.801,20.652 13.25,19.203 13.25,14.963 13.027,14.74 v1(13.027,14.65) ; v1@13.075,14.65 13.075,13.362 12.205,12.492 12.205,10.164 15.43,6.939 15.43,4.89 P2.13
IO_15: P2.14 R21.2 U1.C6 | length 25.9
  Top Layer w0.152: v1(10.516,12.734) 10.503,12.747 10.503,12.874 10.746,13.118 10.746,13.846 11.2,14.3 R21.2
  Bottom Layer w0.152: v2(9.9,21.5) 9.9,20.151 9.447,19.698 9.447,19.053 10.516,17.984 v1@10.516,12.75 ; v1@10.5,12.75 v1@10.516,12.75 ; v1(10.516,12.734) v1@10.516,12.75 ; P2.14 15.125,2.655 15.125,6.719 11.9,9.944 11.9,11.823 10.973,12.75 v1@10.516,12.75
IO_16: P1.14 U1.E7 | length 23.1
  Bottom Layer w0.152: P1.14 2.275,2.275 2.275,7.069 5.729,10.523 5.729,17.379 9.1,20.75 v2(9.1,21.1)
IO_17: P1.13 U1.D7 | length 21
  Top Layer w0.152: P1.13 1.514,3.81 2.654,4.95 v1(2.804,4.95)
  Bottom Layer w0.152: v1(2.804,4.95) 2.775,4.979 2.775,7.138 6.033,10.397 6.033,17.233 9.5,20.7 v2(9.5,21.1)
IO_19: P5.2 R16.1 U1.H8 | length 21.9
  Top Layer w0.152: v1(7.15,16.325) 7.087,16.388 6.395,17.08 6.395,20.026 7.069,20.7 U1.H8 ; v1(10.917,10.871) 11.446,10.871 12.2,11.625 R16.1
  Bottom Layer w0.152: P5.2 6.425,6.35 10.917,10.842 v1(10.917,10.871) 8.625,13.164 8.625,14.102 7.15,15.577 v1(7.15,16.325)
IO_20: P5.1 R17.1 U1.G8 | length 25.4
  Top Layer w0.152: v1(7.975,15.6) 7.975,16.248 6.7,17.523 6.7,19.9 7.15,20.35 8.2,20.35 8.3,20.45 U1.G8 ; v1(11.2,11.775) R17.1
  Bottom Layer w0.152: P5.1 4.789,5.371 7.021,5.371 7.65,6 7.65,6.65 11.446,10.446 11.446,11.529 v1(11.2,11.775) 10.445,11.775 8.93,13.29 8.93,14.615 7.975,15.57 v1(7.975,15.6)
IO_21: P1.12 U1.H7 | length 19.3
  Top Layer w0.152: v2(7.527,21.056) 7.571,21.1 U1.H7
  Bottom Layer w0.152: P1.12 1.27,6.495 2.35,7.575 2.35,9.463 3.533,10.646 3.533,19.784 4.718,20.968 7.439,20.968 v2(7.527,21.056)
IO_23: P1.11 U1.H6 | length 17.2
  Top Layer w0.152: v2(7.493,21.5) U1.H6
  Bottom Layer w0.152: P1.11 3.229,10.849 3.229,19.941 4.56,21.273 7.266,21.273 v2(7.493,21.5)
IO_24: P1.10 U1.G6 | length 19.9
  Top Layer w0.152: P1.10 1.528,11.172 1.528,10.347 v1(3.05,8.825)
  Bottom Layer w0.152: v1(3.05,8.825) 3.838,9.613 3.838,19.657 4.844,20.663 7.601,20.663 7.9,20.962 7.9,21.254 8.126,21.481 8.281,21.481 v2(8.3,21.5)
IO_25: P1.9 U1.F7 | length 11.2
  Top Layer w0.152: P1.9 2.875,15.575 v1(4.65,15.575)
  Bottom Layer w0.152: v1(4.65,15.575) 4.65,16.731 8.7,20.781 v2(8.7,21.1)
IO_26: U1.F6
IO_27: P1.8 U1.H5 | length 10
  Top Layer w0.152: v2(7.019,21.603) 7.019,21.621 7.297,21.9 U1.H5
  Bottom Layer w0.152: P1.8 2.25,17.49 2.25,19.425 4.428,21.603 v2(7.019,21.603)
IO_28: P1.7 U1.G5 | length 8.3
  Bottom Layer w0.152: P1.7 1.412,19.05 4.337,21.975 7.129,21.975 7.179,21.925 8.203,21.925 8.209,21.919 8.281,21.919 v2(8.3,21.9)
IO_29: U1.F5
IO_30: U1.F4
IO_31: U1.G4
IO_32: P1.6 U1.H4 | length 6.9
  Top Layer w0.152: v2(7.414,22.283) 7.424,22.293 7.462,22.293 7.469,22.3 U1.H4
  Bottom Layer w0.152: P1.6 3.488,21.59 4.181,22.283 v2(7.414,22.283)
IO_33: U1.E3
IO_35: U1.F2
IO_40: P1.5 U1.D2 | length 9.1
  Bottom Layer w0.152: P1.5 1.344,24.204 3.441,24.204 3.725,24.487 8.307,24.487 9.5,23.294 v2(9.5,23.1)
IO_43: P1.4 R9.1 U1.D1 | length 12.3
  Top Layer w0.152: U1.D1 9.481,23.519 9.481,23.841 9.425,23.898 v2(9.425,23.925) 9.425,25.232 9.9,25.707 R9.1
  Bottom Layer w0.152: P1.4 3.43,26.67 5.308,24.792 8.558,24.792 v2(9.425,23.925)
IO_44: P1.3 U1.E1 | length 10.9
  Top Layer w0.152: v2(9.075,24.751) 9.075,23.525 U1.E1
  Bottom Layer w0.152: P1.3 1.321,29.21 5.412,25.119 8.708,25.119 v2(9.075,24.751)
IO_45: P1.2 U1.G1 | length 13.4
  Top Layer w0.152: U1.G1 8.3,25.204 8.539,25.443 v1(8.539,25.647)
  Bottom Layer w0.152: P1.2 1.525,31.75 2.325,30.95 2.325,28.637 4.732,26.23 7.956,26.23 v1(8.539,25.647)
NetDS1_1: DS1.1 R5.2 | length 0.8
  Top Layer w0.152: DS1.1 R5.2
NetDS2_1: DS2.1 R22.1 | length 0.9
  Top Layer w0.152: DS2.1 R22.1
NetJ1_A5: J1.A5 R1.1 | length 2.4
  Top Layer w0.152: J1.A5 10.14,28.16 10.8,27.5 R1.1
NetJ1_B5: J1.B5 R2.2 | length 2.4
  Top Layer w0.152: R2.2 6.364,27.164 6.364,27.464 7.14,28.24 J1.B5
PU_CTRL_USBP: R8.1 U1.G2 | length 3.9
  Top Layer w0.152: R8.1 7.213,26.287 7.213,25.936 7.425,25.723 v2(7.425,23.525)
  Bottom Layer w0.152: v2(7.425,23.525) 7.86,23.525 8.285,23.1 v2(8.3,23.1)
S3_USB_D_N: R7.1 U1.F1 | length 3
  Top Layer w0.152: U1.F1 U1.F1 8.699,24.856 9.083,25.241 9.083,25.892 9,25.975 R7.1
S3_USB_D_P: R6.1 U1.H1 | length 2.9
  Top Layer w0.152: U1.H1 7.9,25.775 8.1,25.975 R6.1
SPI_MST_CLK: P3.1 U1.F3 U3.6 | length 32
  Top Layer w0.152: v1(2.4,22.925) 2.4,22.836 2.624,22.612 2.624,16.982 3.371,16.235 U3.6@3.65,16.235 ; U3.6 4.738,16.235 5.729,15.244 5.729,7.932 4.97,7.174 4.97,2.43 P3.1
  Bottom Layer w0.152: v1(2.4,22.925) 3.025,22.925 3.956,23.856 8.011,23.856 8.7,23.167 v2(8.7,22.7)
SPI_MST_MISO: P3.5 U1.H3 U3.2 | length 30.8
  Top Layer w0.152: U1.H3 7.364,22.7 6.005,21.341 6.005,16.723 7.051,15.676 7.762,14.965 ; U3.2 7.762,14.965 ; P3.5 12.84,2.4 10.638,2.4 10.408,2.63 8.17,2.63 7.386,3.414 7.386,6.883 6.523,7.746 6.523,12.633 7.762,13.872 7.762,14.965
SPI_MST_MOSI: P3.4 U1.E2 U3.5 | length 36.8
  Top Layer w0.152: v1(2.75,23.675) 2.75,23.554 2.929,23.375 2.929,17.948 3.358,17.518 3.358,17.505 U3.5 4.244,17.505 6.05,15.699 6.05,7.823 5.275,7.048 5.275,3.123 6.073,2.325 10.25,2.325 11.305,1.27 P3.4
  Bottom Layer w0.152: v1(2.75,23.675) 3.344,23.675 3.851,24.182 8.181,24.182 9.09,23.273 9.09,23.11 v2(9.1,23.1)
SPI_MST_SS1: P4.5 U1.H2 U3.1 | length 30.3
  Top Layer w0.152: v1(7.052,14.002) 7.1,14.05 7.1,15.196 5.7,16.596 5.7,21.467 7.333,23.1 U1.H2 ; v1@7.885,13.25 8.316,13.681 U3.1@9.136,13.681 ; v1@7.886,13.249 v1(7.834,13.196) 7.824,13.187 7.822,13.187 6.85,12.215 6.85,7.85 7.731,6.969 7.731,5.744 8.375,5.1 9.3,5.1 10.3,4.1 10.3,3.2 10.795,2.705 12.865,2.705 P4.5
  Bottom Layer w0.152: v1(7.052,14.002) 7.052,13.99 7.834,13.209 v1(7.834,13.196)
SYS_RSTn: C5.1 P4.4 R13.2 SW2.2 U1.F8 | length 22.5
  Top Layer w0.152: R13.2 7.4,19.85 7.574,20.024 8.374,20.024 ; C5.1 8.374,19.564 8.374,20.024 ; U1.F8 8.7,20.024 ; P4.4 9.945,5.295 9.945,6.967 7.89,9.022 SW2.2 7.89,11.89 9.166,13.166 9.769,13.166 10.079,13.476 10.079,17.97 8.795,19.254 8.795,19.929 8.7,20.024 ; 8.374,20.024 8.7,20.024
USB_D_N: J1.A7 J1.B7 R7.2 R9.2 | length 5.3
  Top Layer w0.152: J1.A7 8.6,29.158 8.6,27.9 9,27.5 ; R7.2 9,27.5 ; J1.B7 9.69,29.148 9.69,27.91 ; R9.2 9.9,27.7 9.69,27.91 ; 9,27.5 9.28,27.5 9.69,27.91
USB_D_P: J1.A6 J1.B6 R6.2 R8.2 | length 6
  Top Layer w0.152: R8.2 7.2,27.45 7.55,27.8 v1(7.825,27.8) ; R6.2 8.1,27.525 v1(7.825,27.8) ; J1.B6 8.14,28.173 7.825,27.858 v1(7.825,27.8) ; v1(9.14,28.183) J1.A6
  Bottom Layer w0.152: v1(7.825,27.8) 8.751,27.8 9.134,28.183 v1(9.14,28.183)
USER_BUTTON: P5.3 SW1.2 U1.E8 | length 15.9
  Top Layer w0.152: U1.E8 9.1,19.38 10.383,18.097 10.383,13.35 9.89,12.856 SW1.2 9.89,7.86 v1(10.25,7.5)
  Bottom Layer w0.152: P5.3 9.1,6.35 v1(10.25,7.5)
USER_LED: DS2.2 U1.G7 | length 8.5
  Top Layer w0.152: DS2.2 4.5,20.6 v1(5.05,20.05)
  Bottom Layer w0.152: v1(5.05,20.05) 5.171,20.05 5.48,20.358 7.728,20.358 8.281,20.911 8.281,21.081 v2(8.3,21.1)
VCCIOA: C10.2 JMP1.2 P4.1 R20.1 R21.1 U1.C2 | length 58.7
  Top Layer w0.152: R21.1 11.349,15.649 11.349,15.786 11.438,15.875 12.2,15.875 ; R20.1 12.2,15.875 ; 15.35,15.875 12.2,15.875
  Top Layer w0.406: v1(12.916,5.016) 14.516,5.016 15.35,5.85 15.35,15.875 ; 15.338,15.887 15.338,21.981 15.507,22.15 15.507,23.017 15.375,23.149 15.375,24.743 16.015,25.383 v1(16.015,25.435)
  Bottom Layer w0.254: 9.461,27.082 9.461,24.412 9.609,24.263 9.867,24.263 C10.2@10.025,24.105 ; v2(9.9,23.1) 9.9,23.4 10.025,23.525 C10.2@10.025,24.105 ; C10.2 10.005,24.105 C10.2@10.025,24.105
  Bottom Layer w0.406: P4.1 4.932,4.932 12.832,4.932 v1(12.916,5.016) ; JMP1.2 7.735,31.085 5.42,28.77 5.42,27.677 6.016,27.082 9.461,27.082 14.368,27.082 v1(16.015,25.435)
VDD1: C1.1 U1.B7 | length 1.3
  Bottom Layer w0.254: v2(10.3,21.1) 10.294,21.094 10.294,20.496 10.785,20.005 C1.1@10.785,20
VDD2: C2.1 U1.B6 | length 1.8
  Bottom Layer w0.152: v2(10.3,21.5) v2@10.303,21.503
  Bottom Layer w0.254: v2@10.3,21.506 10.642,21.506 11.103,21.967 11.677,21.967 C2.1
VIN: C12.1 F1.2 P2.1 U2.1 U2.3 | length 13.8
  Top Layer w0.152: U2.3 12.45,24.45 12.926,24.926 12.926,25.176 C12.1
  Top Layer w0.406: C12.1 13.356,25.606 14.406,25.606 ; U2.1 14.406,24.256 14.406,25.606 ; P2.1 14.375,32.155 14.375,27.05 14.4,27.025 F1.2 14.406,26.994 14.406,25.606
XTAL_IN: C3.2 U1.B8 Y1.1 | length 6.6
  Top Layer w0.152: U1.B8 10.3,20.486 11.108,19.679 11.895,19.679 12.029,19.545 12.029,18.93 12.458,18.5 Y1.1 13.89,18.36 C3.2
XTAL_OUT: C4.2 U1.C8 Y1.2 | length 4.5
  Top Layer w0.152: U1.C8 9.9,20.3 10.776,19.424 10.776,18.774 11.25,18.3 11.11,18.16 C4.2
pads on no net: J1.A8 J1.B8 J1.MP1 J1.MP2 J1.SHIELD1 J1.SHIELD2 J1.SHIELD3 J1.SHIELD4 U2.4

## Polygon pours and split planes (outlines as drawn)
GND on Layer 1 "GND_L02_P000" (solid, pour order 0): 0,35.56 17.78,35.56 17.78,0 0,0
+3.3V on Layer 2 "+3.3V_L03_P001" (solid, pour order 1): 0,35.56 17.78,35.56 17.78,0 0,0

## Silkscreen, mask and mechanical layers (free items; w line width, h text height)
Top Overlay:
  text "RESET" at 3.984,7.931 h1.2
  text "USER" at 10.334,7.931 h1.2
Bottom Overlay:
  text "VIN" at 14.862,35.138 h1.2 r90
  text "GND" at 2.905,33.156 h1.2 r270
  text "GND" at 14.875,32.884 h1.2 r90
  text "VCCIOA" at 7.382,31.264 h1.2 r90
  text "VUSB" at 11.291,31.264 h1.2 r90
  text "45" at 2.911,30.902 h1.2 r270
  text "3V3" at 14.87,30.117 h1.2 r90
  text "44" at 2.917,28.362 h1.2 r270
  text "A0" at 14.869,27.518 h1.2 r90
  text "43" at 2.911,25.822 h1.2 r270
  text "0" at 14.869,24.978 h1.2 r90
  text "40" at 2.911,23.282 h1.2 r270
  text "1" at 14.863,22.438 h1.2 r90
  text "32" at 2.911,20.742 h1.2 r270
  text "2" at 14.87,19.898 h1.2 r90
  text "'.Project' / ARM+FPGA / '.VersionRevision' 2020-11" at 9.661,18.73 h1.3 r90
  text "28" at 2.91,18.202 h1.2 r270
  text "3" at 14.869,17.358 h1.2 r90
  text "27" at 2.911,15.662 h1.2 r270
  text "4" at 14.869,14.818 h1.2 r90
  text "25" at 2.911,13.122 h1.2 r270
  text "6" at 14.869,12.278 h1.2 r90
  text "24" at 2.911,10.582 h1.2 r270
  text "7" at 14.869,9.738 h1.2 r90
  text "23" at 2.91,8.042 h1.2 r270
  text "20" at 4.658,7.235 h1
  text "19" at 7.198,7.235 h1
  text "BTN" at 9.738,7.235 h1
  text "9" at 12.278,7.235 h1
  text "8" at 14.818,7.235 h1
  text "10" at 15.625,7.198 h1 r90
  text "21" at 2.155,5.502 h1 r270
  text "VCCA" at 5.05,4.695 h1
  text "3V3" at 7.198,4.695 h1
  text "GND" at 9.835,4.695 h1
  text "RST" at 12.279,4.695 h1
  text "SS1" at 14.818,4.695 h1
  text "14" at 15.631,4.658 h1 r90
  text "17" at 2.155,2.962 h1 r270
  text "CLK" at 4.658,2.155 h1
  text "3V3" at 7.198,2.155 h1
  text "GND" at 9.835,2.155 h1
  text "MOSI" at 12.499,2.155 h1
  text "MISO" at 15.059,2.155 h1
  text "15" at 15.625,2.118 h1 r90
  text "16" at 2.155,0.325 h1 r270
Mechanical 1:
  the board outline again, w0.1
Dimensions:
  lines w0.381: 22.5,4.4 30.498,4.4 48.893,4.4 60.69,4.4 73.487,4.4 84.684,4.4 ; 22.5,6.8 30.498,6.8 48.893,6.8 60.69,6.8 73.487,6.8 84.684,6.8 ; 22.5,9.2 30.498,9.2 48.893,9.2 60.69,9.2 73.487,9.2 84.684,9.2 ; 22.5,11.6 30.498,11.6 48.893,11.6 60.69,11.6 73.487,11.6 84.684,11.6 ; 22.5,14 30.498,14 48.893,14 60.69,14 73.487,14 84.684,14 ; 22.5,16.4 30.498,16.4 48.893,16.4 60.69,16.4 73.487,16.4 84.684,16.4 ; 22.5,18.8 30.498,18.8 48.893,18.8 60.69,18.8 73.487,18.8 84.684,18.8 ; 22.5,21.2 30.498,21.2 48.893,21.2 60.69,21.2 73.487,21.2 84.684,21.2 ; 22.5,23.6 30.498,23.6 48.893,23.6 60.69,23.6 73.487,23.6 84.684,23.6 ; 22.5,26 30.498,26 48.893,26 60.69,26 73.487,26 84.684,26 ; 22.5,28.4 84.684,28.4 ; 30.498,30.8 30.498,2 ; 48.893,30.8 48.893,2 ; 60.69,30.8 60.69,2 ; 73.487,30.8 73.487,2 ; 30.498,2 22.5,2 22.5,30.8 84.684,30.8 84.684,2 73.487,2 ; 30.498,2 48.893,2 ; 48.893,2 60.69,2 ; 60.69,2 73.487,2
  text "Layer" at 23.8,29 h1.2
  text "Name" at 31.798,29 h1.2
  text "Material" at 50.193,29 h1.2
  text "Thickness" at 61.99,29 h1.2
  text "Constant" at 74.787,29 h1.2
  text "Top Overlay" at 31.798,26.6 h1.2
  text "Top Solder" at 31.798,24.2 h1.2
  text "SM-001" at 50.193,24.2 h1.2
  text "0.013mm" at 61.99,24.2 h1.2
  text "4" at 74.787,24.2 h1.2
  text "1" at 23.8,21.8 h1.2
  text "Top Layer" at 31.798,21.8 h1.2
  text "Copper" at 50.193,21.8 h1.2
  text "0.035mm" at 61.99,21.8 h1.2
  text "Dielectric 2" at 31.798,19.4 h1.2
  text "PP-022" at 50.193,19.4 h1.2
  text "0.200mm" at 61.99,19.4 h1.2
  text "4.6" at 74.787,19.4 h1.2
  text "2" at 23.8,17 h1.2
  text "Layer 1" at 31.798,17 h1.2
  text "Copper" at 50.193,17 h1.2
  text "0.018mm" at 61.99,17 h1.2
  text "Dielectric 3" at 31.798,14.6 h1.2
  text "Core-039" at 50.193,14.6 h1.2
  text "0.665mm" at 61.99,14.6 h1.2
  text "4.8" at 74.787,14.6 h1.2
  text "3" at 23.8,12.2 h1.2
  text "Layer 2" at 31.798,12.2 h1.2
  text "Copper" at 50.193,12.2 h1.2
  text "0.018mm" at 61.99,12.2 h1.2
  text "Dielectric 4" at 31.798,9.8 h1.2
  text "PP-022" at 50.193,9.8 h1.2
  text "0.200mm" at 61.99,9.8 h1.2
  text "4.6" at 74.787,9.8 h1.2
  text "4" at 23.8,7.4 h1.2
  text "Bottom Layer" at 31.798,7.4 h1.2
  text "Copper" at 50.193,7.4 h1.2
  text "0.035mm" at 61.99,7.4 h1.2
  text "Bottom Solder" at 31.798,5 h1.2
  text "SM-001" at 50.193,5 h1.2
  text "0.013mm" at 61.99,5 h1.2
  text "4" at 74.787,5 h1.2
  text "Bottom Overlay" at 31.798,2.6 h1.2
  text "Total board thickness:" at 23.8,0.2 h1.2
  text "1.195mm" at 61.99,0.2 h1.2

## Dimensions
0,0 to 17.78,0 on Dimensions
0,35.56 to 0,0 on Dimensions

## Text inside footprints (layer, text, board x,y; h text height)
L?: Bottom Overlay "BLIN / KIN / LABS" at 9.12,20.55 h1.15 r90